# Altium PCB DAPLink-STM32F103CBT6.PcbDoc
Units mm, origin at the board's own origin, x right, y up, seen from the top; angles counter-clockwise.
Board outline 43.28 x 20.15 mm, 2 copper layers (Top Layer, Bottom Layer), stack 1.636 mm thick; 37 components, 31 nets, 155 pads, 50 vias.
Unrouted connection lines stored in the file: 2.
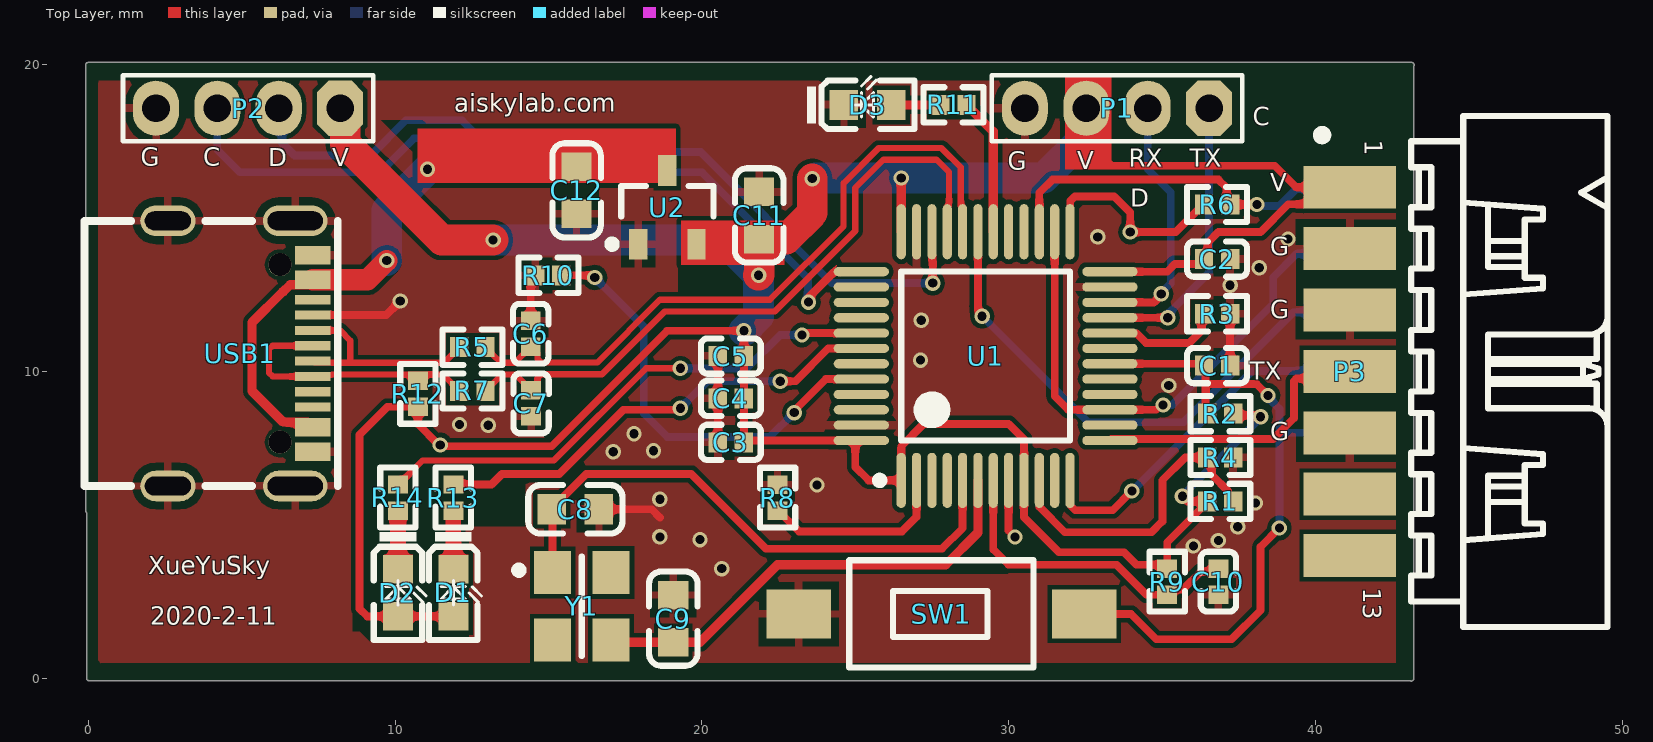
[diagram p0: Top Layer view]
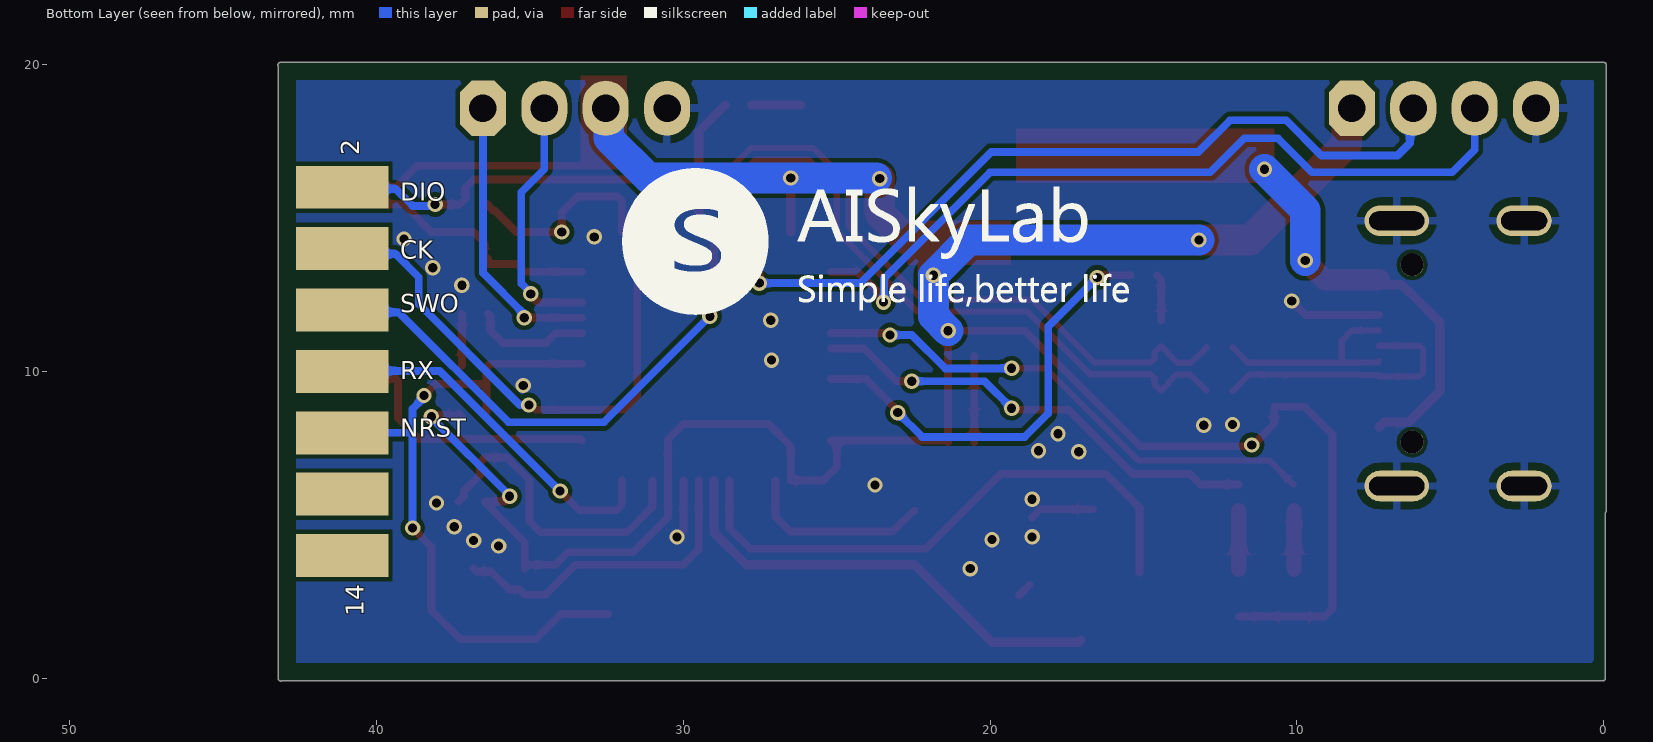
[diagram p1: Bottom Layer view, seen from below]

## Layer stack, top to bottom
Top Solder: solder mask 0.0127, Solder Resist, Dk 3.3
Top Layer: signal copper 0.0178
Dielectric1: core 1.6, FR-4, Dk 4.3
Bottom Layer: signal copper 0.0178
Bottom Solder: solder mask 0.0127, Solder Resist, Dk 3.3

## Board outline
-0.049,5.398 cw(c0,5.458) -0.077,5.458 -0.077,19.99 cw(c0,19.99) 0,20.066 43.123,20.066 cw(c43.123,19.99) 43.199,19.99 cw(c43.123,19.99) 43.199,19.984 cw(c43.123,19.979) 43.199,19.979 cw(c43.123,19.979) 43.189,19.941 43.189,-0.011 cw(c43.112,-0.011) 43.074,-0.077 0.028,-0.077 cw(c0.028,0) -0.049,0

## Design rules (kind name [scope] priority, off if disabled: settings)
Clearance Clearance_2 [InComponent('USB1')] p1: gap=0.12 ignorepadtopadclearanceinfootprint=FALSE
Clearance Clearance_1 [InComponent('SW1')] p2: gap=0.152 ignorepadtopadclearanceinfootprint=FALSE except(0: Arc-SMDPad; 0.025: Arc-Arc)
Clearance [All] p3: gap=0.152 ignorepadtopadclearanceinfootprint=FALSE except(0.025: Arc-Arc)
DiffPairsRouting [All] p1: maxlimit=0.254 minlimit=0.178 mostfreqgap=0.178 toplayer_minwidth=0.203 toplayer_maxwidth=0.203 toplayer_prefwidth=0.203 bottomlayer_minwidth=0.203 bottomlayer_maxwidth=0.203 bottomlayer_prefwidth=0.203 maxuncoupledlength=12.7
HoleSize [All] p1: absolutevalues=TRUE maxlimit=7.62 minlimit=0.254 maxpercent=80.000 minpercent=20.000
HoleToHoleClearance [All] p1: gap=0 allowstackedmicrovias=TRUE
MinimumAnnularRing [All] p1: minimumring=0.1
MinimumSolderMaskSliver [All] p1 off: minsoldermaskwidth=0.254
PasteMaskExpansion [All] p1: expansion=0.254
PlaneClearance [All] p1: clearance=0.381
PlaneConnect [All] p1: pad.planeconnectstyle=Relief pad.reliefexpansion=0.508 pad.reliefentries=4 pad.reliefconductorwidth=0.254 pad.reliefairgap=0.254 via.planeconnectstyle=Direct via.reliefexpansion=0.508 via.reliefentries=4 via.reliefconductorwidth=0.254 via.reliefairgap=0.254
PolygonConnect [All] p1: thpad.connectstyle=Relief thpad.reliefconductorwidth=0.254 thpad.reliefentries=4 thpad.polygonreliefangle="90 Angle" thpad.airgapwidth=0.254 smdpad.connectstyle=Relief smdpad.reliefconductorwidth=0.254 smdpad.reliefentries=4 smdpad.polygonreliefangle="90 Angle" smdpad.airgapwidth=0.254 via.connectstyle=Direct via.reliefconductorwidth=0.254 via.reliefentries=4 via.polygonreliefangle="90 Angle" via.airgapwidth=0.254
RoutingVias [All] p1: holewidth=0.3 width=0.5 viastyle="Through Hole" minholewidth=0.3 minwidth=0.45 maxholewidth=0.3 maxwidth=1
SilkToSilkClearance [All] p1 off: silktosilkclearance=0.254
SilkToSolderMaskClearance SilkscreenOverComponentPads [IsPad] p1 off: minsilkscreentomaskgap=0.254 clearancetoexposedcopper=TRUE
SolderMaskExpansion [All] p1: expansion=0.254 istentingtop=FALSE
Width [All] p1: maxlimit=2.54 minlimit=0.1 preferedwidth=0.254
21 further rules are at their usual default settings.

## Classes and differential pairs
differential pair class USB2Diff: TGT_USB_D USB2D
differential pair USB2D: +USB2D_P -USB2D_N
differential pair TGT_USB_D: +TGT_USB_D_P -TGT_USB_D_N

## Components (designator, comment, footprint, x,y, rotation, side; value= is the part's Value field where it differs from the comment)
C1 "100nF (104) 10% 16V" 0402_C 36.782,10.19 r180 top
C2 "100nF (104) 10% 16V" 0402_C 36.782,13.659 r180 top
C3 "100nF (104) 10% 16V" 0402_C 20.942,7.69 r0 top
C4 "100nF (104) 10% 16V" 0402_C 20.942,9.125 r0 top
C5 "100nF (104) 10% 16V" 0402_C 20.942,10.5 r0 top
C6 "18pF (180) 5% 50V" 0402_C 14.422,11.227 r270 top
C7 "18pF (180) 5% 50V" 0402_C 14.432,8.959 r90 top
C8 "22pF" 0603_C 15.874,5.509 r180 top
C9 "22pF" 0603_C 19.065,1.944 r270 top
C10 "100nF (104) 10% 16V" 0402_C 36.824,3.15 r90 top
C11 "1uF (105) 10% 50V" 0603_C 21.863,15.083 r270 top
C12 "1uF (105) 10% 50V" 0603_C 15.916,15.9 r90 top
D1 "蓝灯 0603" 0603_LED_S1 11.899,2.788 r270 top
D2 "绿灯 0603" 0603_LED_S1 10.096,2.788 r270 top
D3 "红灯 0603" 0603_LED_S1 25.395,18.684 r0 top
P1 "Header 4" N4B-2.0 33.522,18.574 r180 top
P2 "Header 4" N4B-2.0 5.212,18.574 r180 top
P3 "Header 5X2" MOLEX_87831-1420_H 43.104,10 r270 top
R1 "4.7KΩ (4701) ±1%" 0402_R 36.888,5.763 r180 top
R2 "100KΩ (1003) ±1%" 0402_R 36.888,8.627 r0 top
R3 "10KΩ (1002) ±1%" 0402_R 36.782,11.879 r0 top
R4 "4.7KΩ (4701) ±1%" 0402_R 36.888,7.195 r180 top
R5 "33Ω (33R0) ±1%" 0402_R 12.524,10.789 r0 top
R6 "100Ω (1000) ±1%" 0402_R 36.782,15.438 r0 top
R7 "33Ω (33R0) ±1%" 0402_R 12.524,9.363 r180 top
R8 "10KΩ (1002) ±1%" 0402_R 22.463,5.889 r90 top
R9 "100KΩ (1003) ±1%" 0402_R 35.157,3.15 r90 top
R10 "100KΩ (1003) ±1%" 0402_R 14.997,13.131 r180 top
R11 "470Ω (4700) ±1%" 0402_R 28.195,18.684 r0 top
R12 "1.5KΩ (1501) ±1%" 0402_R 10.744,9.271 r90 top
R13 "470Ω (4700) ±1%" 0402_R 11.899,5.892 r270 top
R14 "470Ω (4700) ±1%" 0402_R 10.096,5.892 r270 top
SW1 "SW-PB" PB_TYCO_FSMSM 27.8,2.1 r180 top
U1 "STM32F103CBT6" STM32F103CBT6-FOOTPRINT-1 29.241,10.5 r90 top
U2 "XC6206P332MR" SOT95P245X110-3N 18.872,15.346 r90 top
USB1 "Type-C 16Pin" PCBComponent_1 4.2,10.6 r270 top
Y1 "8MHz" OSC_SI-TIME_SIT1602-2 16.085,2.349 r0 top

## Footprints (in the part's own frame and the unit in brackets; to place one, negate y for a bottom-side part, rotate by r counter-clockwise, add the part's x,y. Pads: shape width x height; smd on the part's side, far side on the other; paste and mask are expansions set on the pad)
0402_C [mm]
  rect 0.6x0.65 smd mask+0.051: 1(-0.425,0) 2(0.425,0)
  silkscreen extent -0.97,-0.58 0.97,0.58, body extent -0.48,-0.3 0.52,0.3, height 0.2
0402_R [mm]
  rect 0.6x0.65 smd mask+0.051: 1(-0.425,0) 2(0.425,0)
  silkscreen extent -0.97,-0.58 0.98,0.57, body extent -0.57,-0.27 0.58,0.28, height 0.41
0603_C [mm]
  rect 0.93x0.98 smd: 1(-0.77,0) 2(0.77,0)
  silkscreen extent -1.53,-0.79 1.54,0.79, body extent -0.8,-0.4 0.8,0.4, height 0.3
0603_LED_S1 [mm]
  rect 0.93x0.98 smd: A(0.77,0) K(-0.77,0)
  silkscreen extent -1.97,-0.79 1.54,0.92, body extent -0.8,-0.4 0.8,0.4, height 0.6
MOLEX_87831-1420_H [mm] "2.00mm (.079\") Pitch Milli-Grid?Header, Vertical, Shrouded, Center Polarization Slot, Locking Window, 14 Circuits (Customized PCB Edge assembly)"
  rect 1.4x3 smd paste-1.5: 1(-6,-2) 3(-4,-2) 5(-2,-2) 7(0,-2) 9(2,-2) 11(4,-2) 13(6,-2)
  rect 1.4x3 smd far side paste-1.5: 2(-6,-2) 4(-4,-2) 6(-2,-2) 8(0,-2) 10(2,-2) 12(4,-2) 14(6,-2)
  silkscreen extent -8.33,-3.05 8.32,6.4, body extent -8.32,-3.53 8.33,6.4, height 2.35
N4B-2.0 [mm]
  oct 1.5x1.8 hole 0.9: 1(-3,0)
  oval 1.5x1.8 hole 0.9: 2(-1,0) 3(1,0) 4(3,0)
  silkscreen extent -4.07,-1.07 4.08,1.07, body extent -4,-1 4,1, height 5.6
OSC_SI-TIME_SIT1602-2 [mm] "SiT1602 Oscillators Series, Version 3.2mmx2.5mm, Pitch 2.1mm; 4 Pin"
  rect 1.2x1.4 smd: 1(-0.95,1.1) 2(-0.95,-1.1) 3(0.95,-1.1) 4(0.95,1.1)
  silkscreen extent -2.17,-1.62 0,1.63, body extent -1.55,-1.8 1.55,1.8, height 0.8
PB_TYCO_FSMSM [mm] "Body 3.5x6.0mm, Pushbutton Switch,  TYCO FSMSM Serie"
  rect 2.1x1.6 smd: 1(-4.65,0) 2(4.65,0)
  silkscreen extent -3,-1.75 3,1.75, body extent -5,-1.75 5,1.75, height 4.3
PCBComponent_1 [mm]
  oval 1x2.099 hole 0.61 slot 1.8 at 90 deg: 1(-4.307,2.55) 2(4.333,2.55)
  oval 1x1.799 hole 0.61 slot 1.5 at 90 deg: 3(-4.307,-1.6) 4(4.333,-1.6)
  rect 0.6x1.15 smd: A1B12(-3.187,3.125) A4B9(-2.387,3.125) B1A12(3.213,3.125) B4A9(2.413,3.125)
  rect 0.3x1.15 smd: A5(-1.237,3.125) A6(-0.237,3.125) A7(0.263,3.125) A8(-1.737,3.125) B5(1.763,3.125) B6(0.763,3.125) B7(-0.737,3.125) B8(1.263,3.125)
  round 0.75 hole 0.75 unplated: ""(-2.877,2.05) ""(2.903,2.05)
  silkscreen extent -4.3,-4.32 4.33,3.94, body extent -4.47,-4.28 4.47,3.3, height 3.26
SOT95P245X110-3N [mm] "SOT23, 3-Leads, Body 2.90x2.45mm, Pitch 0.95mm, IPC Medium Density"
  rect 1x0.6 smd: 1(-1.2,0.95) 2(-1.2,-0.95) 3(1.2,0)
  silkscreen extent -1.32,-1.5 0.7,1.92, body extent -1.3,-1.5 1.3,1.5, height 1.1
STM32F103CBT6-FOOTPRINT-1 [mm]
  oval 1.8x0.3 smd: 1(-4.05,2.75) 2(-4.05,2.25) 3(-4.05,1.75) 4(-4.05,1.25) 5(-4.05,0.75) 6(-4.05,0.25) 7(-4.05,-0.25) 8(-4.05,-0.75) 9(-4.05,-1.25) 10(-4.05,-1.75) 11(-4.05,-2.25) 12(-4.05,-2.75) 25(4.05,-2.75) 26(4.05,-2.25) 27(4.05,-1.75) 28(4.05,-1.25) 29(4.05,-0.75) 30(4.05,-0.25) 31(4.05,0.25) 32(4.05,0.75) 33(4.05,1.25) 34(4.05,1.75) 35(4.05,2.25) 36(4.05,2.75)
  oval 0.3x1.8 smd: 13(-2.75,-4.05) 14(-2.25,-4.05) 15(-1.75,-4.05) 16(-1.25,-4.05) 17(-0.75,-4.05) 18(-0.25,-4.05) 19(0.25,-4.05) 20(0.75,-4.05) 21(1.25,-4.05) 22(1.75,-4.05) 23(2.25,-4.05) 24(2.75,-4.05) 37(2.75,4.05) 38(2.25,4.05) 39(1.75,4.05) 40(1.25,4.05) 41(0.75,4.05) 42(0.25,4.05) 43(-0.25,4.05) 44(-0.75,4.05) 45(-1.25,4.05) 46(-1.75,4.05) 47(-2.25,4.05) 48(-2.75,4.05)
  silkscreen extent -4.17,-2.75 2.75,3.57, body extent -3.5,-3.5 3.5,3.5, height 1.6

## Part data
C1 C2 C3 C4 C5 C10: library part "0402 100nF (104) 10% 16V", "贴片电容", Package=0402, SuppliersPartNumber=C1525, ComponentLink1Description=供应商链接, ComponentLink1URL=http://www.szlcsc.com/product/details_1877.html, Supplier=LC
C6 C7: library part "0402 18pF (180) 5% 50V", "贴片电容", Package=0402, SuppliersPartNumber=C1549, ComponentLink1Description=供应商链接, ComponentLink1URL=http://www.szlcsc.com/product/details_1901.html, Supplier=LC
C8 C9: library part Cap, "Capacitor", LatestRevisionDate=17-Jul-2002, LatestRevisionNote="Re-released for DXP Platform.", PackageReference=RAD-0.3, Published=8-Jun-2000, Publisher="Altium Limited"
C11 C12: library part "0603 1uF (105) 10% 50V", "贴片电容", Package=0603, SuppliersPartNumber=C15849, ComponentLink1Description=供应商链接, ComponentLink1URL=http://www.szlcsc.com/product/details_16531.html, Supplier=LC
D1: library part "0603 蓝灯", "发光二极管", Package=0603, SuppliersPartNumber=C72041, ComponentLink1Description=供应商链接, ComponentLink1URL=http://www.szlcsc.com/product/details_73150.html, Supplier=LC
D2: library part "0603 绿灯", "发光二极管", Package=0603, SuppliersPartNumber=C72043, ComponentLink1Description=供应商链接, ComponentLink1URL=http://www.szlcsc.com/product/details_73152.html, Supplier=LC
D3: library part "0603 红灯", "发光二极管", Package=0603, SuppliersPartNumber=C2286, ComponentLink1Description=供应商链接, ComponentLink1URL=http://www.szlcsc.com/product/details_2659.html, Supplier=LC
P1 P2: "Header, 4-Pin", LatestRevisionDate=17-Jul-2002, LatestRevisionNote="Re-released for DXP Platform.", Publisher="Altium Limited"
P3: "Header, 5-Pin, Dual row", LatestRevisionDate=17-Jul-2002, LatestRevisionNote="Re-released for DXP Platform.", Publisher="Altium Limited"
R1 R4: library part "0402 4.7KΩ (4701) 1%", "贴片电阻", Package=0402, SuppliersPartNumber=C25900, ComponentLink1Description=供应商链接, ComponentLink1URL=http://www.szlcsc.com/product/details_26643.html, Supplier=LC
R2 R9 R10: library part "0402 100KΩ (1003) 1%", "贴片电阻", Package=0402, SuppliersPartNumber=C25741, ComponentLink1Description=供应商链接, ComponentLink1URL=http://www.szlcsc.com/product/details_26484.html, Supplier=LC
R3 R8: library part "0402 10KΩ (1002) 1%", "贴片电阻", Package=0402, SuppliersPartNumber=C25744, ComponentLink1Description=供应商链接, ComponentLink1URL=http://www.szlcsc.com/product/details_26487.html, Supplier=LC
R5 R7: library part "0402 33Ω (33R0) 1%", "贴片电阻", Package=0402, SuppliersPartNumber=C25105, ComponentLink1Description=供应商链接, ComponentLink1URL=http://www.szlcsc.com/product/details_25848.html, Supplier=LC
R6: library part "0402 100Ω (1000) 1%", "贴片电阻", Package=0402, SuppliersPartNumber=C25076, ComponentLink1Description=供应商链接, ComponentLink1URL=http://www.szlcsc.com/product/details_25819.html, Supplier=LC
R11 R13 R14: library part "0402 470Ω (4700) 1%", "贴片电阻", Package=0402, SuppliersPartNumber=C25117, ComponentLink1Description=供应商链接, ComponentLink1URL=http://www.szlcsc.com/product/details_25860.html, Supplier=LC
R12: library part "0402 1.5KΩ (1501) 1%", "贴片电阻", Package=0402, SuppliersPartNumber=C25867, ComponentLink1Description=供应商链接, ComponentLink1URL=http://www.szlcsc.com/product/details_26610.html, Supplier=LC
SW1: "Switch", LatestRevisionDate=17-Jul-2002, LatestRevisionNote="Re-released for DXP Platform.", PackageDescription="Switch; 2 Leads", PackageReference=SPST-2, Published=24-Mar-1999, Publisher="Altium Limited"
U1: library part CMP-020-00023-1, "ARM® 32-bit Cortex®-M3 CPU Core,72 MHz maximum frequency", Case/Package=LQFP48, Pins=48, RAM Size="64 or 128 Kbytes of Flash memory, 20 Kbytes of SRAM"
U2: library part CMP-019-00049-1, "低压差线性稳压(LDO),最大输入8V，输出电流100mA", Case/Package=SOT-23, Max Operating Temperature=80°C, Max Supply Voltage=8V, Min Operating Temperature=-25°C, Output Voltage=3.3V, Pins=3
USB1: library part TYPE-C16PIN, ComponentLink1Description=嘉立创, ComponentLink1URL=https://item.szlcsc.com/372551.html, Datasheet="javascript:fileModule.downloadFileNoRemark('https://atta.szlcsc.com/upload/public/pdf/source/20190521/C393939_7B9043D4CF1026AF443AB60D91FBCD5C.pdf%3FExpires%3D4070880000%26OSSAccessKeyId%3DLTAIJDIkh7KmGS1H%26Signature%3DcQcE%252FNX1dDNXtBUBosJ1RmuR16Q%253D%26response-content-disposition%3Dattachment%253Bfilename%253DC393939_TYPE-C%2525E6%2525AF%25258D%2525E5%2525BA%2525A716PIN%2525E5%2525BF%2525AB%2525E5%252585%252585%2525E9%252597%2525AA%2525E5%252585%252585USB3.0%2525E6%2525B2%252589%2525E6%25259D%2525BF%2525E6%2525AF%25258D%2525E5%2525BA%2525A7%2525E8%2525BF%25259E%2525E6%25258E%2525A5%2525E5%252599%2525A8_2019-05-21.PDF','60D38A6780882313296C67311B688FC3','new_pdf_doc_pdf','');buriedPoint({ty: 'click',op: 'download_pdf',data: 'C393939'});"
Y1: library part XTAL-4

## Via types
v1: diameter 0.5, hole 0.3, Top Layer to Bottom Layer, tented both sides, 49 vias
v2: diameter 0.5, hole 0.3, Top Layer to Bottom Layer, 1 vias

## Nets (pads, with @x,y where several pads share a name; then routed paths per layer and width w, separated by ;. In a path a pad name is that pad's centre, name@x,y a point inside that pad or via, vN(x,y) a via of type N, cw(c..) or ccw(c..) an arc to the next point about the centre after c; other vN are vias at no path point)
GND: C1.1 C2.1 C3.1 C4.1 C5.1 C6.1 C7.1 C8.1 C9.1 C10.1 C11.1 C12.1 D3.K P1.4 P2.4 P3.3 P3.5 P3.9 R3.2 R4.1 R8.2 R10.2 SW1.2 U1.8 U1.23 U1.35 U1.47 U2.1 USB1.1 USB1.2 USB1.3 USB1.4 USB1.A1B12 USB1.A5 USB1.B1A12 | length 13.6
  Top Layer w0.254: USB1.A5 9.712,11.837 v1@10.124,12.25 ; v1@10.124,12.251 v1(10.168,12.295) ; C6.1 14.422,12.981 R10.2 ; C8.1 18.36,5.509 18.629,5.241 ; C9.1@18.702,3.052 19.04,2.714 C9.1 ; C3.1 C4.1 C5.1 ; U1.8 29.991,4.813 v1(30.2,4.604) ; C1.1 R3.2
  other v1: 20.644,3.575 36.011,4.314 36.824,4.489 19.935,4.521 18.629,4.61 37.454,4.938 38.035,5.715 18.629,5.835 17.11,7.386 18.419,7.418 17.788,7.968 13.039,8.245 12.099,8.269 35.207,9.543 27.121,10.368 27.141,11.666 37.207,12.805 38.153,13.378 39.092,14.313 32.896,14.382
  other v2: 23.751,6.299
HSE_IN: C8.2 U1.5 Y1.1 | length 18.8
  Top Layer w0.254: Y1.1 15.135,5.478 C8.2 15.104,5.534 16.229,6.659 19.649,6.659 22.088,4.22 27.817,4.22 28.491,4.895 U1.5
HSE_OUT: C9.2 U1.6 Y1.3 | length 15.2
  Top Layer w0.3: Y1.3 17.11,1.174 19.935,1.174 22.463,3.703 27.942,3.703 28.991,4.752 U1.6
I2C2_SCL: P1.1 U1.21 | length 9.3
  Top Layer w0.254: U1.21 v1(35.176,11.75)
  Bottom Layer w0.254: v1(35.176,11.75) 35.176,11.865 36.522,13.21 P1.1
I2C2_SDA: P1.2 U1.22 | length 8.3
  Top Layer w0.254: U1.22 34.722,12.25 34.966,12.494 v1(34.966,12.527)
  Bottom Layer w0.254: P1.2 34.522,16.585 35.274,15.833 35.274,12.867 34.934,12.527 v1(34.966,12.527)
IF_SWCLK: P2.3 U1.37 | length 26.2
  Top Layer w0.254: v1(23.469,12.259) 23.469,12.409 24.301,13.241 25.183,13.241 U1.37
  Bottom Layer w0.254: P2.3 4.212,17.221 4.941,16.492 9.52,16.492 10.622,17.594 11.721,17.594 12.823,16.492 19.997,16.492 23.451,13.038 23.451,12.277 v1(23.469,12.259)
IF_SWDIO: P2.2 U1.34 | length 26.9
  Top Layer w0.254: U1.34 27.491,13.788 27.517,13.762 v1(27.517,12.877)
  Bottom Layer w0.254: P2.2 6.319,18.466 6.319,17.442 6.726,17.035 9.204,17.035 10.353,18.184 12.18,18.184 13.214,17.149 19.958,17.149 24.231,12.877 v1(27.517,12.877)
LED_COM_GRN: R14.1 U1.41 | length 17.1
  Top Layer w0.203: R14.1 10.121,6.317 10.904,7.1 15.181,7.1 18.18,10.1 v1(19.298,10.1)
  Top Layer w0.254: v1(23.257,11.187) 23.32,11.25 U1.41
  Bottom Layer w0.254: v1(19.298,10.1) 21.462,10.1 22.549,11.187 v1(23.257,11.187)
LED_DAP_BLUE: R13.1 U1.42 | length 15.1
  Top Layer w0.254: R13.1 13.145,6.317 13.488,6.659 15.353,6.659 17.445,8.751 19.183,8.751 19.185,8.753 19.248,8.753 19.25,8.751 v1(19.298,8.8) ; v1(22.549,9.683) 23.046,9.683 24.114,10.75 U1.42
  Bottom Layer w0.254: v1(19.298,8.8) 20.181,9.683 v1(22.549,9.683)
LED_PWR_RED: R11.2 U1.30 | length 4.5
  Top Layer w0.3: R11.2 29.491,17.812 U1.30
NetC10_2: C10.2 R9.1 U1.7 | length 10.5
  Top Layer w0.254: U1.7 29.491,4.203 29.991,3.703 33.507,3.703 34.484,2.725 R9.1 35.33,2.898 35.671,2.898 36.249,3.477 36.726,3.477 C10.2
NetD1_K: D1.K R13.2 | length 1.9
  Top Layer w0.5: D1.K R13.2
NetD2_K: D2.K R14.2 | length 1.9
  Top Layer w0.5: D2.K R14.2
NetD3_A: D3.A R11.1 | length 1.6
  Top Layer w0.3: D3.A R11.1
NetR1_1: R1.1 R4.2 U1.10 | length 10.3
  Top Layer w0.254: U1.10 31,6.441 31,5.584 31.824,4.76 34.645,4.76 35,5.115 35,6.45 35.745,7.195 R4.2 36.612,7.046 36.612,6.62 36.626,6.62 37.14,6.107 37.14,5.936 R1.1
NetR3_1: R3.1 U1.20 | length 3.9
  Top Layer w0.254: U1.20 33.3,11.241 34.157,11.241 34.471,10.927 35.879,10.927 36.274,11.322 36.274,11.797 R3.1
NetR6_1: R6.1 U1.25 | length 6.7
  Top Layer w0.254: U1.25 32,14.559 32,15.551 32.149,15.7 33.427,15.7 33.951,15.176 v1(33.951,14.541) 35.434,14.541 36.134,15.24 36.184,15.24 36.357,15.413 R6.1
NetR8_1: R8.1 U1.2 | length 6.2
  Top Layer w0.254: R8.1 22.488,5.464 23.164,4.788 26.519,4.788 26.991,5.26 U1.2
NetR10_1: R10.1 U1.44 | length 14.4
  Top Layer w0.254: R10.1 16.435,13.131 v1(16.508,13.058) ; v1(23.004,8.659) 23.004,8.723 24.032,9.75 U1.44
  Bottom Layer w0.254: v1(16.508,13.058) 18.102,11.465 18.102,8.632 18.866,7.868 22.213,7.868 v1(23.004,8.659)
TGT_NRESET: C1.2 P3.10 R2.1 SW1.1 U1.18 | length 23.1
  Top Layer w0.254: SW1.1 33.975,2.1 34.802,1.273 37.253,1.273 38.2,2.221 38.2,4.288 v1(38.813,4.9) ; U1.18 36.297,10.25 C1.2 36.41,10.137 36.41,9.543 ; R2.1@36.463,8.627 36.41,8.68 36.41,9.543 ; v1(38.444,9.218) 38.076,9.586 36.452,9.586 36.41,9.543
  Bottom Layer w0.254: v1(38.444,9.218) 38.444,9.151 38.813,8.782 38.813,8 ; v1(38.813,4.9) 38.813,8 ; P3.10 38.813,8
TGT_RX: P3.8 U1.12 | length 11.9
  Top Layer w0.254: U1.12 32,6.441 32,5.641 32.163,5.478 33.378,5.478 v1(34.006,6.107)
  Bottom Layer w0.254: v1(34.006,6.107) 34.023,6.107 37.934,10.018 41.086,10.018 P3.8
TGT_SWCLK: P3.4 U1.15 U1.26 | length 17.8
  Top Layer w0.254: U1.26 31.491,9.188 31.929,8.75 34.802,8.75 34.957,8.906 v1(35.024,8.906)
  Bottom Layer w0.254: v1(35.024,8.906) 35.318,8.906 38.613,12.2 38.613,13.071 39.372,13.83 40.934,13.83 P3.4
TGT_SWDIO: P3.2 R6.2 U1.27 | length 12.4
  Top Layer w0.254: U1.27 30.991,15.821 31.42,16.25 36.824,16.25 37.093,15.981 37.093,15.627 37.282,15.438 v1(38.079,15.438)
  Bottom Layer w0.254: v1(38.079,15.438) 38.126,15.392 38.813,15.392 39.372,15.951 41.055,15.951 P3.2
TGT_SWO: P3.6 U1.31 | length 17.7
  Top Layer w0.254: U1.31 28.991,12.002 29.128,11.865 v1(29.128,11.797)
  Bottom Layer w0.254: v1(29.128,11.797) 32.581,8.344 35.686,8.344 39.272,11.93 41.034,11.93 P3.6
TGT_TX: P3.7 U1.13 | length 9.5
  Top Layer w0.254: U1.13 33.341,7.8 38.612,7.8 39.286,8.473 39.286,9.682 39.372,9.768 40.872,9.768 P3.7
TGT_USB_D_N: R5.1 USB1.A7 USB1.B7 | length 7.1
  Top Layer w0.203: USB1.A7 7.373,10.289 7.95,10.289 7.953,10.285 8.544,10.285 ; USB1.B7 8.212,11.337 8.544,11.005 8.544,10.285 ; R5.1 11.595,10.285 8.544,10.285
TGT_USB_D_P: R7.1 R12.2 USB1.A6 USB1.B6 | length 8.8
  Top Layer w0.203: USB1.A6 6.012,10.837 5.893,10.718 5.893,9.956 6.012,9.837 USB1.B6 7.373,9.885 7.935,9.885 7.953,9.904 10.744,9.904 11.558,9.904 12.099,9.363
USB2D_N: C6.2 R5.2 U1.32 | length 22.4
  Top Layer w0.203: R5.2 12.949,10.764 13.148,10.566 13.173,10.566 13.457,10.282 13.902,10.282 14.199,10.579 14.199,10.604 14.397,10.802 C6.2 14.447,10.802 14.646,10.604 14.646,10.407 14.765,10.288 16.585,10.288 18.629,12.333 22.213,12.333 24.614,14.733 24.614,16.137 25.756,17.279 27.802,17.279 28.432,16.649 28.432,15.386 28.491,15.326 U1.32
USB2D_P: C7.2 R7.2 U1.33 | length 21.8
  Top Layer w0.203: 12.949,9.363 12.949,9.388 13.148,9.586 13.173,9.586 13.488,9.901 13.915,9.901 14.208,9.607 14.208,9.582 14.407,9.384 C7.2 14.447,9.384 14.646,9.582 14.646,9.788 14.765,9.907 16.743,9.907 18.787,11.952 22.371,11.952 24.995,14.575 24.995,15.979 25.914,16.898 27.644,16.898 28.051,16.492 28.051,15.386 27.991,15.326 U1.33
VBus: C12.2 U2.3 USB1.A4B9 USB1.B4A9 | length 20.1
  Top Layer w0.254: 6.34,12.593 6.354,12.593 ; USB1.A4B9@7.16,12.822 USB1.A4B9 ; v1(11.06,16.585) 16.839,16.585 17.464,17.21
  Top Layer w0.305: 6.34,12.593 5.343,11.596 5.343,9.363 6.354,8.351 7.16,8.351 USB1.B4A9 ; 6.354,12.593 6.584,12.822 USB1.A4B9@7.16,12.822
  Top Layer w0.7: USB1.A4B9 9.104,12.987 v1(9.729,13.612)
  Bottom Layer w1: v1(9.729,13.612) 9.729,15.254 v1(11.06,16.585)
VCC3V3: C2.2 C3.2 C4.2 C5.2 C11.2 D1.A D2.A P1.3 P2.1 P3.1 R1.2 R2.2 R9.2 R12.1 U1.1 U1.9 U1.24 U1.36 U1.48 U2.2 | length 108.6
  Top Layer w0.254: v1@11.472,7.562 15.103,7.562 18.864,11.322 v1(21.367,11.322) C5.2 C4.2 C3.2 21.427,7.75 U1.48@25.016,7.75 ; v1(11.472,7.604) 11.43,7.604 10.744,8.29 R12.1 9.756,8.846 8.845,7.935 8.845,2.271 9.097,2.018 D2.A D1.A ; U1.48 U1.48@25.016,7.75 ; P1.3 32.601,18.495 32.601,17.442 33.342,16.7 38.657,16.7 39.357,16 40.213,16 40.213,15.929 39.731,15.447 39.106,15.447 38.2,14.541 36.824,14.541 36.477,14.194 36.477,13.78 C2.2 ; U1.24 35.157,13.25 35.407,13.5 C2.2@36.357,13.5 ; v1(35.653,5.931) 35.821,5.763 R1.2 36.463,5.738 35.157,4.432 R9.2 35.029,3.703 34.157,3.703 33.751,4.109 31.632,4.109 30.491,5.25 U1.9 30.491,7.788 29.991,8.288 27.218,8.288 26.491,7.562 U1.1 25.429,6.45 24.995,6.884 24.995,7.729 U1.48@25.016,7.75 ; R2.2@37.207,8.521 R2.2 37.372,8.568 38.153,8.568 v1(38.2,8.521)
  Top Layer w0.3: U1.36 v1(26.491,16.3)
  Top Layer w1: P2.1 8.38,18.406 8.38,17.422 11.521,14.281 v1(13.196,14.281) ; v1(21.845,13.134) 21.863,13.152 C11.2 22.744,14.313 23.597,15.165 v1(23.597,16.281)
  Bottom Layer w0.254: v1(35.653,5.931) 35.653,5.952 38.2,8.5 v1(38.2,8.521)
  Bottom Layer w1: v1(13.196,14.281) 20.698,14.281 v1(21.845,13.134) 21.845,11.801 v1(21.367,11.322) ; v1@23.698,16.3 v1(26.491,16.3) 31.128,16.3 32.426,17.598 32.426,18.478 P1.3
pads on no net: P3.11 P3.12 P3.13 P3.14 U1.3 U1.4 U1.11 U1.14 U1.16 U1.17 U1.19 U1.28 U1.29 U1.38 U1.39 U1.40 U1.43 U1.45 U1.46 USB1. USB1.A8 USB1.B5 USB1.B8 Y1.2 Y1.4

## Polygon pours and split planes (outlines as drawn)
GND on Top Layer "GND_L01_P000" (solid, remove dead copper, pour order 0): 42.604,0.508 42.604,19.474 0.346,19.474 0.338,19.482 0.33,19.474 0.33,0.5
GND on Bottom Layer "GND_L02_P001" (solid, remove dead copper, pour order 1): 0.33,0.5 0.33,19.458 0.354,19.482 42.596,19.482 42.596,0.516 42.604,0.508

## Other copper
Top Layer:
  rectangle net VCC3V3: 31.828,16.585 33.342,19.649
  rectangle net VCC3V3: 19.324,13.469 22.689,14.911
  rectangle net VBus: 10.729,16.137 19.149,17.914
  pour cut-out: 27.942,3.394 29.968,3.394 29.991,3.418 29.285,4.124 29.285,4.738 27.942,3.394
  pour cut-out: 9.709,6.351 9.531,6.351 8.607,5.426 8.607,1.52 8.845,1.52 9.176,1.188 9.261,1.273 12.412,1.273 12.412,4.604 12.099,4.917 12.121,4.938 14.262,4.938 14.262,6.326 14.252,6.336 14.239,6.323 9.666,6.323
  pour cut-out: 11.021,18.079 10.894,18.207 9.52,18.207 9.52,18.196 10.729,16.987 11.021,17.279
  pour cut-out: 19.208,13.421 19.208,12.593 21.278,12.593 21.091,12.78 21.091,13.304 19.324,13.304

## Silkscreen, mask and mechanical layers (free items; w line width, h text height)
Top Overlay:
  text "aiskylab.com" at 11.938,18.272 h1
  text "C" at 37.937,17.823 h1
  text "G" at 1.72,16.506 h1
  text "C" at 3.757,16.506 h1
  text "D" at 5.875,16.492 h1
  text "V" at 7.953,16.492 h1
  text "RX" at 33.904,16.47 h1
  text "TX" at 35.899,16.47 h1
  text "V" at 32.234,16.384 h1
  text "G" at 29.958,16.37 h1
  text "V" at 38.523,15.677 h1
  text "D" at 33.951,15.176 h1
  text "G" at 38.513,13.596 h1
  text "G" at 38.513,11.539 h1
  text "TX" at 37.85,9.532 h1
  text "G" at 38.513,7.563 h1
  text "XueYuSky" at 1.969,3.2 h1
  text "2020-2-11" at 2.019,1.553 h1
Bottom Overlay:
  drawing of 5761 lines, arcs and shapes, not listed
  text "DIO" at 39.218,15.363 h1
  text "CK" at 39.218,13.481 h1
  text "SWO" at 39.218,11.731 h1
  text "RX" at 39.218,9.554 h1
  text "NRST" at 39.218,7.676 h1
Board:
  lines w0.152: 0,5.458 0,14.558 ; 0,14.55 0,19.99 43.123,19.99 ; 0.028,5.45 0.028,0 43.112,0 ; 43.112,-0.011 43.112,19.989 43.123,19.979

## Dimensions
0.028,0 to 0,19.99 on Dimensions
0.028,0 to 43.112,0 on Dimensions

## Text inside footprints (layer, text, board x,y; h text height)
P3: Top Overlay "13" at 41.354,2.95 h1.02 r270; Top Overlay "1" at 41.404,17.55 h1.02 r270; Bottom Overlay "14" at 40.204,2.027 h1.02 r270; Bottom Overlay "2" at 40.354,17.035 h1.02 r270